# EAGLE board FullTalonBreakout2 (EAGLE 9.1.3)
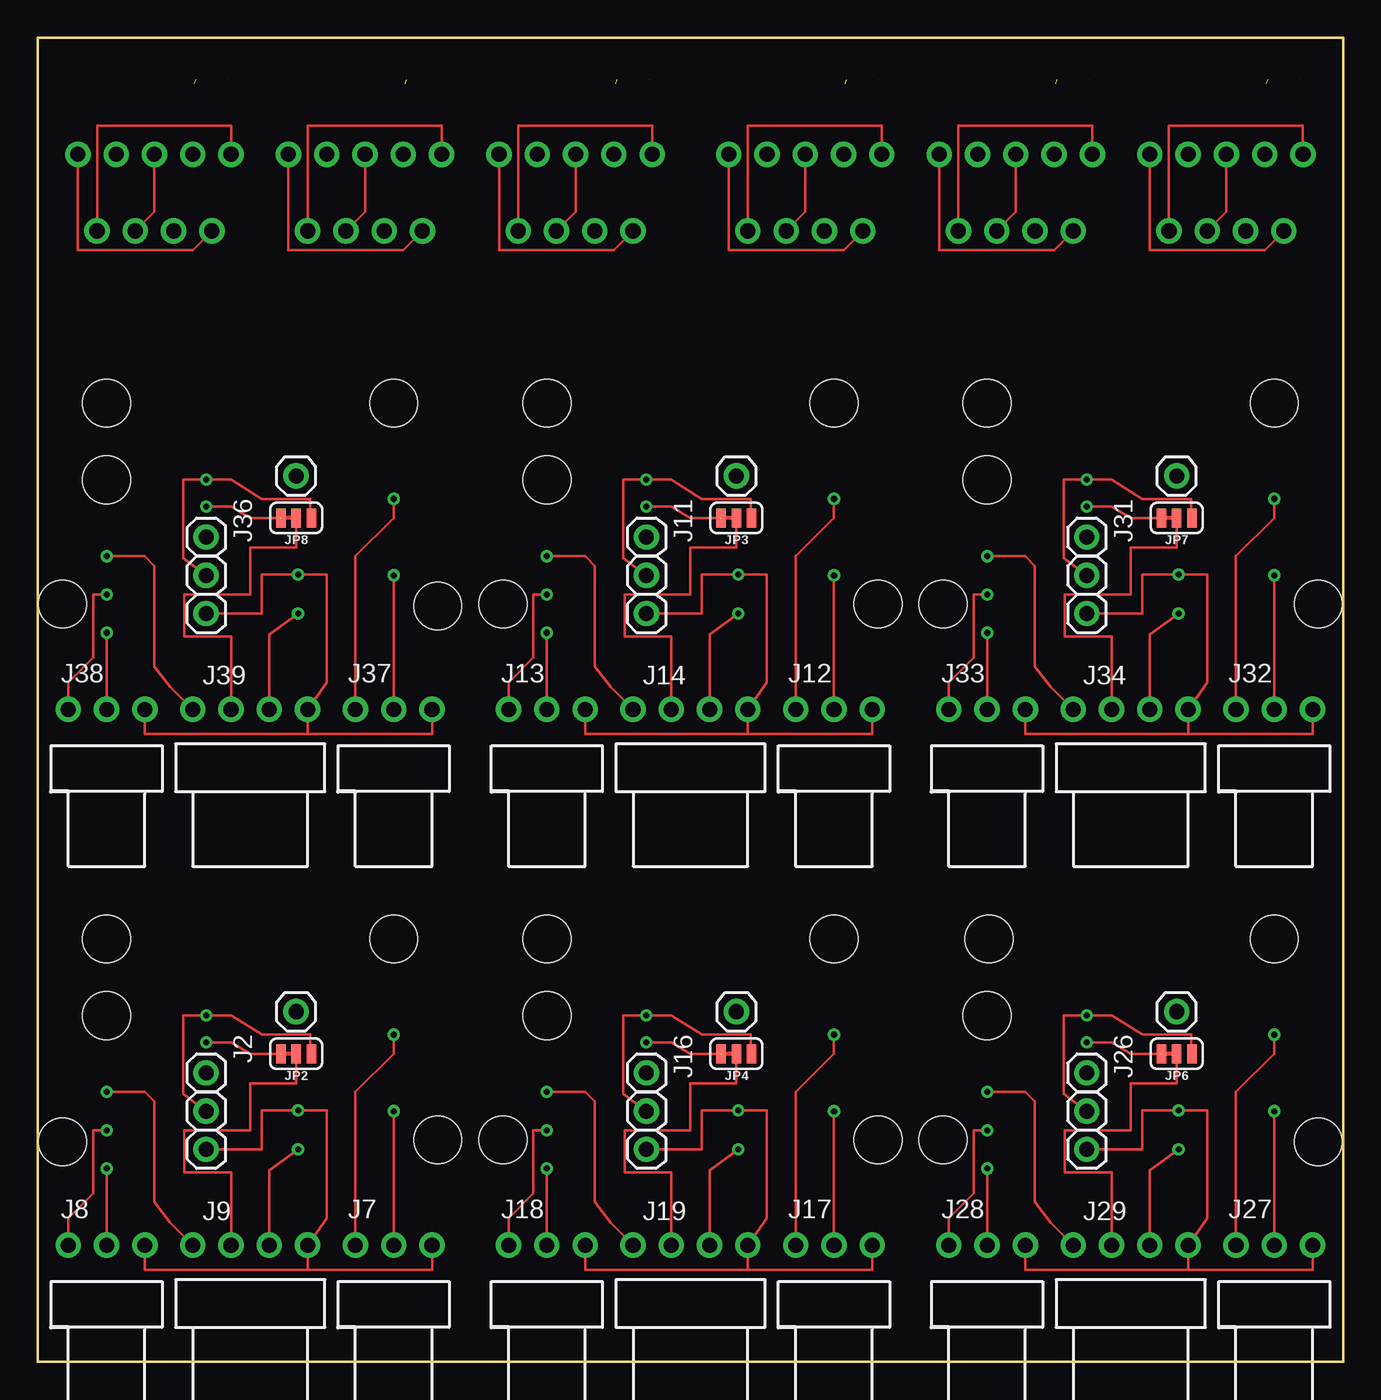
[diagram p0: board, top side]
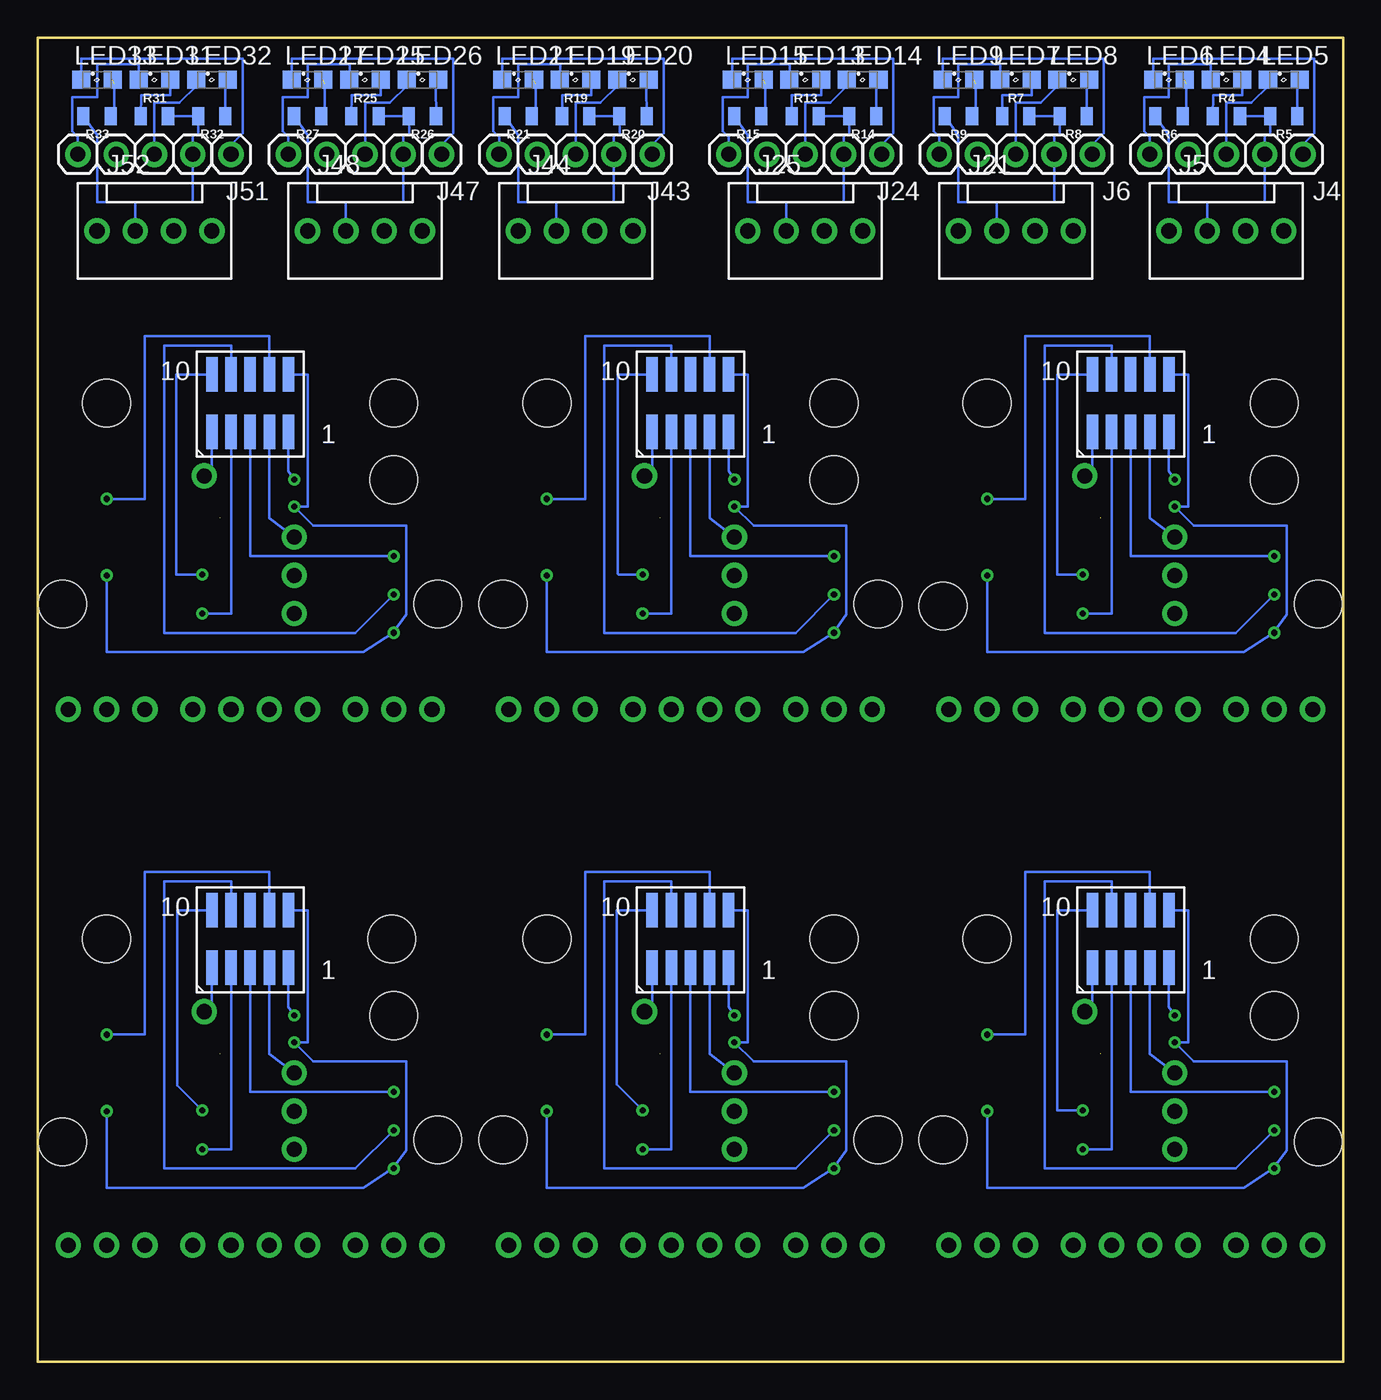
[diagram p1: board, bottom side, seen from below]

Size 86.61 x 87.88 mm. Coordinates in mm from the lower left corner, seen from the top.
Outline: 0,0 86.61,0 86.61,87.88 0,87.88 0,0
Copper layers (1*16): Top 0.035mm / dielectric 1.5mm / Bottom 0.035mm
Design rules "default *": minimum track width 6mil, minimum drill 0.35mm, track to track 6mil, track to pad 6mil, pad to pad 6mil, via to via 6mil, smd to smd 6mil, copper to edge 40mil, drill to drill 6mil, minimum pad ring 10mil, minimum via ring 8mil, stop-mask expansion 4mil, vias tented up to drill 25mil, thermal gap 10mil
Holes 3.17 mm at 4.57,63.63 23.62,63.63 4.57,58.55 33.78,63.63 33.78,58.55 30.86,50.29 26.54,50.16 1.65,50.29 52.83,63.63 62.99,63.63 62.99,58.55 82.04,63.63 84.96,50.29 60.07,50.29 55.75,50.29 4.57,28.07 4.57,22.99 23.62,28.07 33.78,28.07 33.78,22.99 52.83,28.07 63.12,28.07 62.99,22.99 55.75,14.73 60.07,14.73 82.04,28.07 84.96,14.61 30.86,14.73 26.54,14.73 1.65,14.61

## Footprints (pad centres in the part's own frame; a part is rotated, then mirrored left to right if it is on the bottom)
POST1X3 = drill 1 pad 1.676: 1 0,0; 2 2.54,0; 3 5.08,0
POST1X5 = drill 1 pad 1.676: 1 0,0; 2 2.54,0; 3 5.08,0; 4 7.62,0; 5 10.16,0
NYLON-4 = drill 1 pad 1.676: P$1 0,0; P$2 2.54,0; P$3 5.08,0; P$4 7.62,0
NYLON-RT-3 = drill 1 pad 1.676: P$1 0,0; P$2 2.54,0; P$3 5.08,0
NYLON-RT-4 = drill 1 pad 1.676: P$1 0,0; P$2 2.54,0; P$3 5.08,0; P$4 7.62,0
POST1X1 = drill 1 pad 1.676: 1 0,0
SMT-JUMPER_3_1-NC_TRACE_SILK = smd 0.635 x 1.27: 1 -1.016,0; 2 0,0; 3 1.016,0
SML0805 = smd 1.2 x 1.2: A 1.05,0; C -1.05,0
0805 = smd 0.8 x 1.2: 1 -0.9,0; 2 0.9,0
TALON-5X2-SMD2 = smd 0.762 x 2.286: P$1 2.54,-1.905; P$2 2.54,1.905; P$3 1.27,-1.905; P$4 1.27,1.905; P$5 0,-1.905; P$6 0,1.905; P$7 -1.27,-1.905; P$8 -1.27,1.905; P$9 -2.54,-1.905; P$10 -2.54,1.905

## Placement (x,y rotation side)
J2  [POST1X3]  11.18,19.18 270 top
J4  [POST1X5]  2.67,80.14 180 bottom
J5  [NYLON-4]  11.56,75.06 0 bottom
J6  [POST1X5]  16.64,80.14 180 bottom
J7  [NYLON-RT-3]  21.08,7.75 0 top
J8  [NYLON-RT-3]  2.03,7.75 0 top
J9  HDR-4NYLON-RT-4  [NYLON-RT-4]  10.29,7.75 0 top
J10  HDR-1  [POST1X1]  17.14,23.24 0 top
J11  [POST1X3]  40.39,54.74 270 top
J12  [NYLON-RT-3]  50.29,43.31 0 top
J13  [NYLON-RT-3]  31.24,43.31 0 top
J14  HDR-4NYLON-RT-4  [NYLON-RT-4]  39.5,43.31 0 top
J15  HDR-1  [POST1X1]  46.36,58.8 0 top
J16  [POST1X3]  40.39,19.18 270 top
J17  [NYLON-RT-3]  50.29,7.75 0 top
J18  [NYLON-RT-3]  31.24,7.75 0 top
J19  HDR-4NYLON-RT-4  [NYLON-RT-4]  39.5,7.75 0 top
J20  HDR-1  [POST1X1]  46.36,23.24 0 top
J21  [NYLON-4]  25.53,75.06 0 bottom
J24  [POST1X5]  30.61,80.14 180 bottom
J25  [NYLON-4]  39.5,75.06 0 bottom
J26  [POST1X3]  69.6,19.18 270 top
J27  [NYLON-RT-3]  79.5,7.75 0 top
J28  [NYLON-RT-3]  60.45,7.75 0 top
J29  HDR-4NYLON-RT-4  [NYLON-RT-4]  68.71,7.75 0 top
J30  HDR-1  [POST1X1]  75.56,23.24 0 top
J31  [POST1X3]  69.6,54.74 270 top
J32  [NYLON-RT-3]  79.5,43.31 0 top
J33  [NYLON-RT-3]  60.45,43.31 0 top
J34  HDR-4NYLON-RT-4  [NYLON-RT-4]  68.71,43.31 0 top
J35  HDR-1  [POST1X1]  75.56,58.8 0 top
J36  [POST1X3]  11.18,54.74 270 top
J37  [NYLON-RT-3]  21.08,43.31 0 top
J38  [NYLON-RT-3]  2.03,43.31 0 top
J39  HDR-4NYLON-RT-4  [NYLON-RT-4]  10.29,43.31 0 top
J40  HDR-1  [POST1X1]  17.14,58.8 0 top
J43  [POST1X5]  45.85,80.14 180 bottom
J44  [NYLON-4]  54.74,75.06 0 bottom
J47  [POST1X5]  59.82,80.14 180 bottom
J48  [NYLON-4]  68.71,75.06 0 bottom
J51  [POST1X5]  73.79,80.14 180 bottom
J52  [NYLON-4]  82.68,75.06 0 bottom
JP2  [SMT-JUMPER_3_1-NC_TRACE_SILK]  17.14,20.45 180 top
JP3  [SMT-JUMPER_3_1-NC_TRACE_SILK]  46.36,56.01 180 top
JP4  [SMT-JUMPER_3_1-NC_TRACE_SILK]  46.36,20.45 180 top
JP6  [SMT-JUMPER_3_1-NC_TRACE_SILK]  75.56,20.45 180 top
JP7  [SMT-JUMPER_3_1-NC_TRACE_SILK]  75.56,56.01 180 top
JP8  [SMT-JUMPER_3_1-NC_TRACE_SILK]  17.14,56.01 180 top
LED4  Red  [SML0805]  7.75,85.09 0 bottom
LED5  Green  [SML0805]  3.94,85.09 0 bottom
LED6  Blue  [SML0805]  11.56,85.09 0 bottom
LED7  Red  [SML0805]  21.72,85.09 0 bottom
LED8  Green  [SML0805]  17.91,85.09 0 bottom
LED9  Blue  [SML0805]  25.53,85.09 0 bottom
LED13  Red  [SML0805]  35.69,85.09 0 bottom
LED14  Green  [SML0805]  31.88,85.09 0 bottom
LED15  Blue  [SML0805]  39.5,85.09 0 bottom
LED19  Red  [SML0805]  50.93,85.09 0 bottom
LED20  Green  [SML0805]  47.12,85.09 0 bottom
LED21  Blue  [SML0805]  54.74,85.09 0 bottom
LED25  Red  [SML0805]  64.9,85.09 0 bottom
LED26  Green  [SML0805]  61.09,85.09 0 bottom
LED27  Blue  [SML0805]  68.71,85.09 0 bottom
LED31  Red  [SML0805]  78.87,85.09 0 bottom
LED32  Green  [SML0805]  75.06,85.09 0 bottom
LED33  Blue  [SML0805]  82.68,85.09 0 bottom
R4  330  [0805]  7.75,82.68 0 bottom
R5  680  [0805]  3.94,82.68 180 bottom
R6  680  [0805]  11.56,82.68 180 bottom
R7  330  [0805]  21.72,82.68 0 bottom
R8  680  [0805]  17.91,82.68 180 bottom
R9  680  [0805]  25.53,82.68 180 bottom
R13  330  [0805]  35.69,82.68 0 bottom
R14  680  [0805]  31.88,82.68 180 bottom
R15  680  [0805]  39.5,82.68 180 bottom
R19  330  [0805]  50.93,82.68 0 bottom
R20  680  [0805]  47.12,82.68 180 bottom
R21  680  [0805]  54.74,82.68 180 bottom
R25  330  [0805]  64.9,82.68 0 bottom
R26  680  [0805]  61.09,82.68 180 bottom
R27  680  [0805]  68.71,82.68 180 bottom
R31  330  [0805]  78.87,82.68 0 bottom
R32  680  [0805]  75.06,82.68 180 bottom
R33  680  [0805]  82.68,82.68 180 bottom
T2  [TALON-5X2-SMD2]  14.1,28.07 0 bottom
T3  [TALON-5X2-SMD2]  43.31,63.63 0 bottom
T4  [TALON-5X2-SMD2]  43.31,28.07 0 bottom
T6  [TALON-5X2-SMD2]  72.52,28.07 0 bottom
T7  [TALON-5X2-SMD2]  72.52,63.63 0 bottom
T8  [TALON-5X2-SMD2]  14.1,63.63 0 bottom

## Library data of the parts
J2 J4-J21 J24-J40 J43 J44 J47 J48 J51 J52 T2-T4 T6-T8 = Team4415
JP2-JP4 JP6-JP8 = SparkFun-Jumpers
LED4-LED9 LED13-LED15 LED19-LED21 LED25-LED27 LED31-LED33 = led
R4-R9 R13-R15 R19-R21 R25-R27 R31-R33 = SparkFun-Resistors; PROD_ID: RES-11622

## Nets
3.3V: J16.2 JP4.1 T4.P$1
3.3V-1: J2.2 JP2.1 T2.P$1
3.3V-3: J26.2 JP6.1 T6.P$1
3.3V-4: J36.2 JP8.1 T8.P$1
3.3V-5: J11.2 JP3.1 T3.P$1
3.3V-6: J31.2 JP7.1 T7.P$1
5V-1: J7.P$2 J8.P$2 JP2.3 T2.P$2
5V-2: J17.P$2 J18.P$2 JP4.3 T4.P$2
5V-3: J27.P$2 J28.P$2 JP6.3 T6.P$2
5V-4: J37.P$2 J38.P$2 JP8.3 T8.P$2
5V-5: J12.P$2 J13.P$2 JP3.3 T3.P$2
5V-6: J32.P$2 J33.P$2 JP7.3 T7.P$2
A-1: J2.1 T2.P$3
A-2: J16.1 T4.P$3
A-3: J26.1 T6.P$3
A-4: J36.1 T8.P$3
A-5: J11.1 T3.P$3
A-6: J31.1 T7.P$3
FWD-1: J7.P$1 T2.P$4
FWD-2: J17.P$1 T4.P$4
FWD-3: J27.P$1 T6.P$4
FWD-4: J37.P$1 T8.P$4
FWD-5: J12.P$1 T3.P$4
FWD-6: J32.P$1 T7.P$4
GND-1: J2.3 J7.P$3 J8.P$3 J9.P$4 T2.P$10
GND-2: J16.3 J17.P$3 J18.P$3 J19.P$4 T4.P$10
GND-3: J26.3 J27.P$3 J28.P$3 J29.P$4 T6.P$10
GND-4: J36.3 J37.P$3 J38.P$3 J39.P$4 T8.P$10
GND-5: J11.3 J12.P$3 J13.P$3 J14.P$4 T3.P$10
GND-6: J31.3 J32.P$3 J33.P$3 J34.P$4 T7.P$10
GND-E1: J4.5 J5.P$4 LED4.C
GND-E2: J6.5 J21.P$4 LED7.C
GND-E3: J24.5 J25.P$4 LED13.C
GND-E4: J43.5 J44.P$4 LED19.C
GND-E5: J47.5 J48.P$4 LED25.C
GND-E6: J51.5 J52.P$4 LED31.C
N$2-1: J10.1 T2.P$9
N$2-5: J15.1 T3.P$9
N$4-2: J20.1 T4.P$9
N$4-6: J35.1 T7.P$9
N$4-E1: LED4.A R4.1
N$4-E2: LED7.A R7.1
N$5-E1: LED6.A R6.1
N$5-E2: LED9.A R9.1
N$6-3: J30.1 T6.P$9
N$6-E1: LED5.A R5.1
N$6-E2: LED8.A R8.1
N$8-4: J40.1 T8.P$9
N$10-E3: LED13.A R13.1
N$11-E3: LED15.A R15.1
N$12-E3: LED14.A R14.1
N$16-E4: LED19.A R19.1
N$17-E4: LED21.A R21.1
N$18-E4: LED20.A R20.1
N$22-E5: LED25.A R25.1
N$23-E5: LED27.A R27.1
N$24-E5: LED26.A R26.1
N$28-E6: LED31.A R31.1
N$29-E6: LED33.A R33.1
N$30-E6: LED32.A R32.1
PWR-E1: J4.2 J5.P$2 R4.2 R5.2 R6.2
PWR-E2: J6.2 J21.P$2 R7.2 R8.2 R9.2
PWR-E3: J24.2 J25.P$2 R13.2 R14.2 R15.2
PWR-E4: J43.2 J44.P$2 R19.2 R20.2 R21.2
PWR-E5: J47.2 J48.P$2 R25.2 R26.2 R27.2
PWR-E6: J51.2 J52.P$2 R31.2 R32.2 R33.2
QA-1: J9.P$3 T2.P$7
QA-2: J19.P$3 T4.P$7
QA-3: J29.P$3 T6.P$7
QA-4: J39.P$3 T8.P$7
QA-5: J14.P$3 T3.P$7
QA-6: J34.P$3 T7.P$7
QA-E1: J4.3 J5.P$3 LED5.C
QA-E2: J6.3 J21.P$3 LED8.C
QA-E3: J24.3 J25.P$3 LED14.C
QA-E4: J43.3 J44.P$3 LED20.C
QA-E5: J47.3 J48.P$3 LED26.C
QA-E6: J51.3 J52.P$3 LED32.C
QB-1: J9.P$1 T2.P$5
QB-2: J19.P$1 T4.P$5
QB-3: J29.P$1 T6.P$5
QB-4: J39.P$1 T8.P$5
QB-5: J14.P$1 T3.P$5
QB-6: J34.P$1 T7.P$5
QB-E1: J4.1 J5.P$1 LED6.C
QB-E2: J6.1 J21.P$1 LED9.C
QB-E3: J24.1 J25.P$1 LED15.C
QB-E4: J43.1 J44.P$1 LED21.C
QB-E5: J47.1 J48.P$1 LED27.C
QB-E6: J51.1 J52.P$1 LED33.C
REV-1: J8.P$1 T2.P$8
REV-2: J18.P$1 T4.P$8
REV-3: J28.P$1 T6.P$8
REV-4: J38.P$1 T8.P$8
REV-5: J13.P$1 T3.P$8
REV-6: J33.P$1 T7.P$8
V-1: J9.P$2 JP2.2
V-2: J19.P$2 JP4.2
V-3: J29.P$2 JP6.2
V-4: J39.P$2 JP8.2
V-5: J14.P$2 JP3.2
V-6: J34.P$2 JP7.2

## Tracks (layer width: path | path; a pad name or v marks a point on that pad's centre or on a via)
3.3V  (via drill 0.4)
  Top 0.152: J16.2 38.86,17.78 38.86,22.99 v40.39,22.99 42.04,22.99 44.07,21.72 47.31,21.72 47.31,20.51 JP4.1
  Bottom 0.152: v40.39,22.99 40.77,23.56 T4.P$1
3.3V-1  (via drill 0.4)
  Top 0.152: J2.2 9.65,17.78 9.65,22.99 v11.18,22.99 12.83,22.99 14.86,21.72 18.1,21.72 18.1,20.51 JP2.1
  Bottom 0.152: v11.18,22.99 11.56,23.56 T2.P$1
3.3V-3  (via drill 0.4)
  Top 0.152: J26.2 68.07,17.78 68.07,22.99 v69.6,22.99 71.25,22.99 73.28,21.72 76.52,21.72 76.52,20.51 JP6.1
  Bottom 0.152: v69.6,22.99 69.98,23.56 T6.P$1
3.3V-4  (via drill 0.4)
  Top 0.152: J36.2 9.65,53.34 9.65,58.55 v11.18,58.55 12.83,58.55 14.86,57.28 18.1,57.28 18.1,56.07 JP8.1
  Bottom 0.152: v11.18,58.55 11.56,59.12 T8.P$1
3.3V-5  (via drill 0.4)
  Top 0.152: J11.2 38.86,53.34 38.86,58.55 v40.39,58.55 42.04,58.55 44.07,57.28 47.31,57.28 47.31,56.07 JP3.1
  Bottom 0.152: v40.39,58.55 40.77,59.12 T3.P$1
3.3V-6  (via drill 0.4)
  Top 0.152: J31.2 68.07,53.34 68.07,58.55 v69.6,58.55 71.25,58.55 73.28,57.28 76.52,57.28 76.52,56.07 JP7.1
  Bottom 0.152: v69.6,58.55 69.98,59.12 T7.P$1
5V-1  (via drill 0.4)  (1 unrouted)
  Top 0.152: v11.18,21.21 12.83,21.21 14.1,20.45 16.09,20.45 | J8.P$2 v4.57,12.83 | v23.62,16.64 J7.P$2
  Bottom 0.152: T2.P$2 10.29,29.97 10.29,21.21 v11.18,21.21 9.91,19.94 3.75,19.94 3.75,14.03 4.63,12.83 | v23.62,16.64 23.62,11.56 6.6,11.56 4.63,12.83 | 4.63,12.83 v4.57,12.83
5V-2  (via drill 0.4)  (1 unrouted)
  Top 0.152: v40.39,21.21 42.04,21.21 43.31,20.45 45.3,20.45 | J18.P$2 v33.78,12.83 | v52.83,16.64 J17.P$2
  Bottom 0.152: T4.P$2 39.5,29.97 39.5,21.21 v40.39,21.21 39.12,19.94 32.96,19.94 32.96,14.03 33.85,12.83 | v52.83,16.64 52.83,11.56 35.81,11.56 33.85,12.83 | 33.85,12.83 v33.78,12.83
5V-3  (via drill 0.4)  (1 unrouted)
  Top 0.152: v69.6,21.21 71.25,21.21 72.52,20.45 74.51,20.45 | J28.P$2 v62.99,12.83 | v82.04,16.64 J27.P$2
  Bottom 0.152: T6.P$2 68.71,29.97 68.71,21.21 v69.6,21.21 68.33,19.94 62.17,19.94 62.17,14.03 63.05,12.83 | v82.04,16.64 82.04,11.56 65.02,11.56 63.05,12.83 | 63.05,12.83 v62.99,12.83
5V-4  (via drill 0.4)  (1 unrouted)
  Top 0.152: v11.18,56.77 12.83,56.77 14.1,56.01 16.09,56.01 | J38.P$2 v4.57,48.39 | v23.62,52.2 J37.P$2
  Bottom 0.152: T8.P$2 10.29,65.53 10.29,56.77 v11.18,56.77 9.91,55.5 3.75,55.5 3.75,49.59 4.63,48.39 | v23.62,52.2 23.62,47.12 6.6,47.12 4.63,48.39 | 4.63,48.39 v4.57,48.39
5V-5  (via drill 0.4)  (1 unrouted)
  Top 0.152: v40.39,56.77 42.04,56.77 43.31,56.01 45.3,56.01 | J13.P$2 v33.78,48.39 | v52.83,52.2 J12.P$2
  Bottom 0.152: T3.P$2 39.5,65.53 39.5,56.77 v40.39,56.77 39.12,55.5 32.96,55.5 32.96,49.59 33.85,48.39 | v52.83,52.2 52.83,47.12 35.81,47.12 33.85,48.39 | 33.85,48.39 v33.78,48.39
5V-6  (via drill 0.4)  (1 unrouted)
  Top 0.152: v69.6,56.77 71.25,56.77 72.52,56.01 74.51,56.01 | J33.P$2 v62.99,48.39 | v82.04,52.2 J32.P$2
  Bottom 0.152: T7.P$2 68.71,65.53 68.71,56.77 v69.6,56.77 68.33,55.5 62.17,55.5 62.17,49.59 63.05,48.39 | v82.04,52.2 82.04,47.12 65.02,47.12 63.05,48.39 | 63.05,48.39 v62.99,48.39
A-1
  Bottom 0.152: T2.P$3 12.83,20.45 J2.1
A-2
  Bottom 0.152: T4.P$3 42.04,20.45 J16.1
A-3
  Bottom 0.152: T6.P$3 71.25,20.45 J26.1
A-4
  Bottom 0.152: T8.P$3 12.83,56.01 J36.1
A-5
  Bottom 0.152: T3.P$3 42.04,56.01 J11.1
A-6
  Bottom 0.152: T7.P$3 71.25,56.01 J31.1
FWD-1  (via drill 0.4)
  Top 0.152: v23.62,21.72 23.62,20.45 21.08,17.91 J7.P$1
  Bottom 0.152: T2.P$4 12.83,32.52 16.57,32.52 21.08,32.52 21.08,21.72 v23.62,21.72
FWD-2  (via drill 0.4)
  Top 0.152: v52.83,21.72 52.83,20.45 50.29,17.91 J17.P$1
  Bottom 0.152: T4.P$4 42.04,32.52 45.78,32.52 50.29,32.52 50.29,21.72 v52.83,21.72
FWD-3  (via drill 0.4)
  Top 0.152: v82.04,21.72 82.04,20.45 79.5,17.91 J27.P$1
  Bottom 0.152: T6.P$4 71.25,32.52 74.99,32.52 79.5,32.52 79.5,21.72 v82.04,21.72
FWD-4  (via drill 0.4)
  Top 0.152: v23.62,57.28 23.62,56.01 21.08,53.47 J37.P$1
  Bottom 0.152: T8.P$4 12.83,68.08 16.57,68.08 21.08,68.08 21.08,57.28 v23.62,57.28
FWD-5  (via drill 0.4)
  Top 0.152: v52.83,57.28 52.83,56.01 50.29,53.47 J12.P$1
  Bottom 0.152: T3.P$4 42.04,68.08 45.78,68.08 50.29,68.08 50.29,57.28 v52.83,57.28
FWD-6  (via drill 0.4)
  Top 0.152: v82.04,57.28 82.04,56.01 79.5,53.47 J32.P$1
  Bottom 0.152: T7.P$4 71.25,68.08 74.99,68.08 79.5,68.08 79.5,57.28 v82.04,57.28
GND-1  (via drill 0.4)
  Top 0.152: J8.P$3 7.11,6.1 17.02,6.1 17.91,6.1 | 17.91,6.1 J9.P$4 19.18,9.53 19.18,16.7 v17.27,16.7 14.86,16.7 14.86,14.1 J2.3 | J7.P$3 26.16,6.1 17.91,6.1
  Bottom 0.152: T2.P$10 18.99,29.97 18.99,16.7 v17.27,16.7
GND-2  (via drill 0.4)
  Top 0.152: J18.P$3 36.32,6.1 46.23,6.1 47.12,6.1 | 47.12,6.1 J19.P$4 48.39,9.53 48.39,16.7 v46.48,16.7 44.07,16.7 44.07,14.1 J16.3 | J17.P$3 55.37,6.1 47.12,6.1
  Bottom 0.152: v46.48,16.7 48.2,18.41 48.2,29.97 T4.P$10
GND-3  (via drill 0.4)
  Top 0.152: J28.P$3 65.53,6.1 75.44,6.1 76.33,6.1 | 76.33,6.1 J29.P$4 77.6,9.53 77.6,16.7 v75.69,16.7 73.28,16.7 73.28,14.1 J26.3 | J27.P$3 84.58,6.1 76.33,6.1
  Bottom 0.152: v75.69,16.7 77.34,18.35 77.34,29.84 77.34,29.97 T6.P$10
GND-4  (via drill 0.4)
  Top 0.152: J38.P$3 7.11,41.66 17.02,41.66 17.91,41.66 | 17.91,41.66 J39.P$4 19.18,45.09 19.18,52.26 v17.27,52.26 14.86,52.26 14.86,49.66 J36.3 | J37.P$3 26.16,41.66 17.91,41.66
  Bottom 0.152: T8.P$10 18.99,65.53 18.99,52.26 v17.27,52.26
GND-5  (via drill 0.4)
  Top 0.152: J13.P$3 36.32,41.66 46.23,41.66 47.12,41.66 | 47.12,41.66 J14.P$4 48.39,45.09 48.39,52.26 v46.48,52.26 44.07,52.26 44.07,49.66 J11.3 | J12.P$3 55.37,41.66 47.12,41.66
  Bottom 0.152: v46.48,52.26 48.07,52.26 48.13,52.32 48.13,65.53 T3.P$10
GND-6  (via drill 0.4)
  Top 0.152: J33.P$3 65.53,41.66 75.44,41.66 76.33,41.66 | 76.33,41.66 J34.P$4 77.6,45.09 77.6,52.26 v75.69,52.26 73.28,52.26 73.28,49.66 J31.3 | J32.P$3 84.58,41.66 76.33,41.66
  Bottom 0.152: T7.P$10 77.41,65.53 77.41,52.26 v75.69,52.26
GND-E1
  Top 0.152: J5.P$4 3.94,82.04 12.83,82.04 J4.5
  Bottom 0.152: J4.5 12.83,81.28 13.21,81.66 13.21,83.95 11.56,83.95 11.56,86.11 8.77,86.11 LED4.C
GND-E2
  Top 0.152: J21.P$4 17.91,82.04 26.8,82.04 J6.5
  Bottom 0.152: J6.5 26.8,81.28 27.18,81.66 27.18,83.95 25.53,83.95 25.53,86.11 22.74,86.11 LED7.C
GND-E3
  Top 0.152: J25.P$4 31.88,82.04 40.77,82.04 J24.5
  Bottom 0.152: J24.5 40.77,81.28 41.15,81.66 41.15,83.95 39.5,83.95 39.5,86.11 36.71,86.11 LED13.C
GND-E4
  Top 0.152: J44.P$4 47.12,82.04 56.01,82.04 J43.5
  Bottom 0.152: J43.5 56.01,81.28 56.39,81.66 56.39,83.95 54.74,83.95 54.74,86.11 51.95,86.11 LED19.C
GND-E5
  Top 0.152: J48.P$4 61.09,82.04 69.98,82.04 J47.5
  Bottom 0.152: J47.5 69.98,81.28 70.36,81.66 70.36,83.95 68.71,83.95 68.71,86.11 65.92,86.11 LED25.C
GND-E6
  Top 0.152: J52.P$4 75.06,82.04 83.95,82.04 J51.5
  Bottom 0.152: J51.5 83.95,81.28 84.33,81.66 84.33,83.95 82.68,83.95 82.68,86.11 79.89,86.11 LED31.C
N$2-1
  Bottom 0.152: T2.P$9 16.64,23.75 J10.1
N$2-5
  Bottom 0.152: T3.P$9 45.85,59.31 J15.1
N$4-2
  Bottom 0.152: T4.P$9 45.85,23.75 J20.1
N$4-6
  Bottom 0.152: T7.P$9 75.06,59.31 J35.1
N$4-E1
  Bottom 0.152: LED4.A 6.7,84.07 8.38,84.07 8.64,84.07 R4.1
N$4-E2
  Bottom 0.152: LED7.A 20.67,84.07 22.35,84.07 22.61,84.07 R7.1
N$5-E1  (1 unrouted)
  Bottom 0.152: 10.4,84.84 10.4,82.93 R6.1
N$5-E2  (1 unrouted)
  Bottom 0.152: 24.37,84.84 24.37,82.93 R9.1
N$6-3
  Bottom 0.152: T6.P$9 75.06,23.75 J30.1
N$6-E1
  Bottom 0.152: R5.1 3.05,84.58 LED5.A
N$6-E2
  Bottom 0.152: R8.1 17.02,84.58 LED8.A
N$8-4
  Bottom 0.152: T8.P$9 16.64,59.31 J40.1
N$10-E3
  Bottom 0.152: LED13.A 34.64,84.07 36.32,84.07 36.58,84.07 R13.1
N$11-E3  (1 unrouted)
  Bottom 0.152: 38.34,84.84 38.34,82.93 R15.1
N$12-E3
  Bottom 0.152: R14.1 30.99,84.58 LED14.A
N$16-E4
  Bottom 0.152: LED19.A 49.88,84.07 51.56,84.07 51.82,84.07 R19.1
N$17-E4  (1 unrouted)
  Bottom 0.152: 53.58,84.84 53.58,82.93 R21.1
N$18-E4
  Bottom 0.152: R20.1 46.23,84.58 LED20.A
N$22-E5
  Bottom 0.152: LED25.A 63.85,84.07 65.53,84.07 65.79,84.07 R25.1
N$23-E5  (1 unrouted)
  Bottom 0.152: 67.55,84.84 67.55,82.93 R27.1
N$24-E5
  Bottom 0.152: R26.1 60.2,84.58 LED26.A
N$28-E6
  Bottom 0.152: LED31.A 77.82,84.07 79.5,84.07 79.76,84.07 R31.1
N$29-E6  (1 unrouted)
  Bottom 0.152: 81.52,84.84 81.52,82.93 R33.1
N$30-E6
  Bottom 0.152: R32.1 74.17,84.58 LED32.A
PWR-E1
  Bottom 0.152: 9.02,76.96 11.56,76.96 11.56,81.41 R6.2 | 9.02,76.96 J5.P$2 | R4.2 R5.2 4.83,81.41 5.21,81.41 J4.2 5.21,76.96 9.02,76.96
PWR-E2
  Bottom 0.152: 22.99,76.96 25.53,76.96 25.53,81.41 R9.2 | 22.99,76.96 J21.P$2 | R7.2 R8.2 18.8,81.41 19.18,81.41 J6.2 19.18,76.96 22.99,76.96
PWR-E3
  Bottom 0.152: 36.96,76.96 39.5,76.96 39.5,81.41 R15.2 | 36.96,76.96 J25.P$2 | R13.2 R14.2 32.77,81.41 33.15,81.41 J24.2 33.15,76.96 36.96,76.96
PWR-E4
  Bottom 0.152: 52.2,76.96 54.74,76.96 54.74,81.41 R21.2 | 52.2,76.96 J44.P$2 | R19.2 R20.2 48.01,81.41 48.39,81.41 J43.2 48.39,76.96 52.2,76.96
PWR-E5
  Bottom 0.152: 66.17,76.96 68.71,76.96 68.71,81.41 R27.2 | 66.17,76.96 J48.P$2 | R25.2 R26.2 61.98,81.41 62.36,81.41 J47.2 62.36,76.96 66.17,76.96
PWR-E6
  Bottom 0.152: 80.14,76.96 82.68,76.96 82.68,81.41 R33.2 | 80.14,76.96 J52.P$2 | R31.2 R32.2 75.95,81.41 76.33,81.41 J51.2 76.33,76.96 80.14,76.96
QA-1  (via drill 0.4)
  Top 0.152: v17.27,14.1 15.37,12.7 J9.P$3
  Bottom 0.152: T2.P$7 15.37,14.1 v17.27,14.1
QA-2  (via drill 0.4)
  Top 0.152: v46.48,14.1 44.58,12.7 J19.P$3
  Bottom 0.152: T4.P$7 44.58,14.1 v46.48,14.1
QA-3  (via drill 0.4)
  Top 0.152: v75.69,14.1 73.79,12.7 J29.P$3
  Bottom 0.152: T6.P$7 73.79,14.1 v75.69,14.1
QA-4  (via drill 0.4)
  Top 0.152: v17.27,49.66 15.37,48.26 J39.P$3
  Bottom 0.152: T8.P$7 15.37,49.66 v17.27,49.66
QA-5  (via drill 0.4)
  Top 0.152: v46.48,49.66 44.58,48.26 J14.P$3
  Bottom 0.152: T3.P$7 44.58,49.66 v46.48,49.66
QA-6  (via drill 0.4)
  Top 0.152: v75.69,49.66 73.79,48.26 J34.P$3
  Bottom 0.152: T7.P$7 73.79,49.66 v75.69,49.66
QA-E1
  Top 0.152: J5.P$3 7.75,76.33 J4.3
  Bottom 0.152: J4.3 7.75,83.57 6.1,83.57 4.95,84.71 4.99,84.74 LED5.C
QA-E2
  Top 0.152: J21.P$3 21.72,76.33 J6.3
  Bottom 0.152: J6.3 21.72,83.57 20.07,83.57 18.92,84.71 18.96,84.74 LED8.C
QA-E3
  Top 0.152: J25.P$3 35.69,76.33 J24.3
  Bottom 0.152: J24.3 35.69,83.57 34.04,83.57 32.89,84.71 32.93,84.74 LED14.C
QA-E4
  Top 0.152: J44.P$3 50.93,76.33 J43.3
  Bottom 0.152: J43.3 50.93,83.57 49.28,83.57 48.13,84.71 48.17,84.74 LED20.C
QA-E5
  Top 0.152: J48.P$3 64.9,76.33 J47.3
  Bottom 0.152: J47.3 64.9,83.57 63.25,83.57 62.1,84.71 62.14,84.74 LED26.C
QA-E6
  Top 0.152: J52.P$3 78.87,76.33 J51.3
  Bottom 0.152: J51.3 78.87,83.57 77.22,83.57 76.07,84.71 76.11,84.74 LED32.C
QB-1  (via drill 0.4)
  Top 0.152: J9.P$1 8.81,9.23 7.75,10.6 7.75,17.27 7.11,17.91 v4.57,17.91
  Bottom 0.152: T2.P$5 14.1,26.04 | 14.1,26.04 14.1,25.65 | v4.57,17.91 14.1,17.91 14.1,26.04
QB-2  (via drill 0.4)
  Top 0.152: J19.P$1 38.02,9.23 36.96,10.6 36.96,17.27 36.32,17.91 v33.78,17.91
  Bottom 0.152: T4.P$5 43.31,26.04 | 43.31,26.04 43.31,25.65 | v33.78,17.91 43.31,17.91 43.31,26.04
QB-3  (via drill 0.4)
  Top 0.152: J29.P$1 67.22,9.23 66.17,10.6 66.17,17.27 65.53,17.91 v62.99,17.91
  Bottom 0.152: T6.P$5 72.52,26.04 | 72.52,26.04 72.52,25.65 | v62.99,17.91 72.52,17.91 72.52,26.04
QB-4  (via drill 0.4)
  Top 0.152: J39.P$1 8.81,44.79 7.75,46.16 7.75,52.83 7.11,53.47 v4.57,53.47
  Bottom 0.152: T8.P$5 14.1,61.6 | 14.1,61.6 14.1,61.21 | v4.57,53.47 14.1,53.47 14.1,61.6
QB-5  (via drill 0.4)
  Top 0.152: J14.P$1 38.02,44.79 36.96,46.16 36.96,52.83 36.32,53.47 v33.78,53.47
  Bottom 0.152: T3.P$5 43.31,61.6 | 43.31,61.6 43.31,61.21 | v33.78,53.47 43.31,53.47 43.31,61.6
QB-6  (via drill 0.4)
  Top 0.152: J34.P$1 67.22,44.79 66.17,46.16 66.17,52.83 65.53,53.47 v62.99,53.47
  Bottom 0.152: T7.P$5 72.52,61.6 | 72.52,61.6 72.52,61.21 | v62.99,53.47 72.52,53.47 72.52,61.6
QB-E1  (1 unrouted)
  Top 0.152: J4.1 2.67,78.23 2.67,73.79 10.29,73.79 J5.P$1
  Bottom 0.152: LED6.C 12.61,86.49 1.91,86.49 1.91,81.91 1.91,81.53 2.67,80.77 J4.1
QB-E2  (1 unrouted)
  Top 0.152: J6.1 16.64,78.23 16.64,73.79 24.26,73.79 J21.P$1
  Bottom 0.152: LED9.C 26.58,86.49 15.88,86.49 15.88,81.91 15.88,81.53 16.64,80.77 J6.1
QB-E3  (1 unrouted)
  Top 0.152: J24.1 30.61,78.23 30.61,73.79 38.23,73.79 J25.P$1
  Bottom 0.152: LED15.C 40.55,86.49 29.84,86.49 29.84,81.91 29.84,81.53 30.61,80.77 J24.1
QB-E4  (1 unrouted)
  Top 0.152: J43.1 45.85,78.23 45.85,73.79 53.47,73.79 J44.P$1
  Bottom 0.152: LED21.C 55.79,86.49 45.09,86.49 45.09,81.91 45.09,81.53 45.85,80.77 J43.1
QB-E5  (1 unrouted)
  Top 0.152: J47.1 59.82,78.23 59.82,73.79 67.44,73.79 J48.P$1
  Bottom 0.152: LED27.C 69.76,86.49 59.05,86.49 59.05,81.91 59.05,81.53 59.82,80.77 J47.1
QB-E6  (1 unrouted)
  Top 0.152: J51.1 73.79,78.23 73.79,73.79 81.41,73.79 J52.P$1
  Bottom 0.152: LED33.C 83.73,86.49 73.02,86.49 73.02,81.91 73.02,81.53 73.79,80.77 J51.1
REV-1  (via drill 0.4)
  Top 0.152: v4.57,15.37 3.68,15.37 3.68,11.18 2.03,9.53 J8.P$1
  Bottom 0.152: T2.P$8 15.37,31.88 19.18,31.88 19.81,31.88 19.81,12.83 7.11,12.83 v4.57,15.37
REV-2  (via drill 0.4)
  Top 0.152: v33.78,15.37 32.89,15.37 32.89,11.18 31.24,9.53 J18.P$1
  Bottom 0.152: T4.P$8 44.58,31.88 48.39,31.88 49.02,31.88 49.02,12.83 36.32,12.83 v33.78,15.37
REV-3  (via drill 0.4)
  Top 0.152: v62.99,15.37 62.1,15.37 62.1,11.18 60.45,9.53 J28.P$1
  Bottom 0.152: T6.P$8 73.79,31.88 77.6,31.88 78.23,31.88 78.23,12.83 65.53,12.83 v62.99,15.37
REV-4  (via drill 0.4)
  Top 0.152: v4.57,50.93 3.68,50.93 3.68,46.74 2.03,45.09 J38.P$1
  Bottom 0.152: T8.P$8 15.37,67.44 19.18,67.44 19.81,67.44 19.81,48.39 7.11,48.39 v4.57,50.93
REV-5  (via drill 0.4)
  Top 0.152: v33.78,50.93 32.89,50.93 32.89,46.74 31.24,45.09 J13.P$1
  Bottom 0.152: T3.P$8 44.58,67.44 48.39,67.44 49.02,67.44 49.02,48.39 36.32,48.39 v33.78,50.93
REV-6  (via drill 0.4)
  Top 0.152: v62.99,50.93 62.1,50.93 62.1,46.74 60.45,45.09 J33.P$1
  Bottom 0.152: T7.P$8 73.79,67.44 77.6,67.44 78.23,67.44 78.23,48.39 65.53,48.39 v62.99,50.93
V-1
  Top 0.152: J9.P$2 12.83,12.59 9.73,12.58 9.73,15.36 14.1,15.37 14.1,18.48 17.14,18.48 JP2.2
V-2
  Top 0.152: J19.P$2 42.04,12.59 38.94,12.58 38.94,15.36 43.31,15.37 43.31,18.48 46.36,18.48 JP4.2
V-3
  Top 0.152: J29.P$2 71.25,12.59 68.15,12.58 68.15,15.36 72.52,15.37 72.52,18.48 75.56,18.48 JP6.2
V-4
  Top 0.152: J39.P$2 12.83,48.15 9.73,48.14 9.73,50.92 14.1,50.93 14.1,54.04 17.14,54.04 JP8.2
V-5
  Top 0.152: J14.P$2 42.04,48.15 38.94,48.14 38.94,50.92 43.31,50.93 43.31,54.04 46.36,54.04 JP3.2
V-6
  Top 0.152: J34.P$2 71.25,48.15 68.15,48.14 68.15,50.92 72.52,50.93 72.52,54.04 75.56,54.04 JP7.2

## Text on the board
tSilk: + | 5
_tsilk: EPIC Robotz / ENC v2 / Fall 2018 | EPIC Robotz / ENC v2 / Fall 2018 | EPIC Robotz / ENC v2 / Fall 2018 | EPIC Robotz / ENC v2 / Fall 2018 | EPIC Robotz / ENC v2 / Fall 2018 | EPIC Robotz / ENC v2 / Fall 2018 | TALON Breakout | TALON Breakout | TALON Breakout | EPIC Robotz | EPIC Robotz | EPIC Robotz | Fall 2018 / v2 | Indx | Fall 2018 / v2 | Indx | Fall 2018 / v2 | Indx | 5 | 3.3 | 5 | 3.3 | 3.3 | An | An | An | 3.3 | 3.3 | 3.3 | G | G | G | 5 | + | S | 5 | G | S | 5 | G | S | 5 | G | S | 5 | G | + | S | 5 | G | S | G | B | A | G | B | + | A | G | B | A | G | REV | Encoder | FWD | REV | Encoder | FWD | REV | Encoder | FWD | TALON Breakout | TALON Breakout | TALON Breakout | EPIC Robotz | EPIC Robotz | EPIC Robotz | Fall 2018 / v2 | Fall 2018 / v2 | Fall 2018 / v2 | Indx | Indx | Indx | 5 | 3.3 | 5 | 3.3 | 5 | 3.3 | An | An | An | 3.3 | 3.3 | 3.3 | G | G | G | S | 5 | G | B | + | A | G | S | 5 | G | S | 5 | G | B | + | A | G | S | 5 | G | S | 5 | G | B | + | A | G | S | 5 | G | REV | Encoder | FWD | REV | Encoder | FWD | REV | Encoder | FWD
_bsilk: + | + | + | + | + | + | + | + | + | + | + | + | B | + | A | G | B | + | A | G | B | + | A | G | B | + | A | G | B | + | A | G | B | + | A | G | G | A | + | B | G | A | + | B | G | A | + | B | G | A | + | B | G | A | + | B | G | A | + | B | TALON Breakout / EPIC Robotz - Fall 2018 v2 | TALON Breakout / EPIC Robotz - Fall 2018 v2 | TALON Breakout / EPIC Robotz - Fall 2018 v2 | TALON Breakout / EPIC Robotz - Fall 2018 v2 | TALON Breakout / EPIC Robotz - Fall 2018 v2 | TALON Breakout / EPIC Robotz - Fall 2018 v2